# Altium PCB Team_Upsilon_Prj2_smain_pcb.PcbDoc
Units mil, origin at the board's own origin, x right, y up, seen from the top; angles counter-clockwise.
Board outline 3235 x 3830 mil, 2 copper layers (Top Layer, Bottom Layer); 48 components, 53 nets, 158 pads, 0 vias.
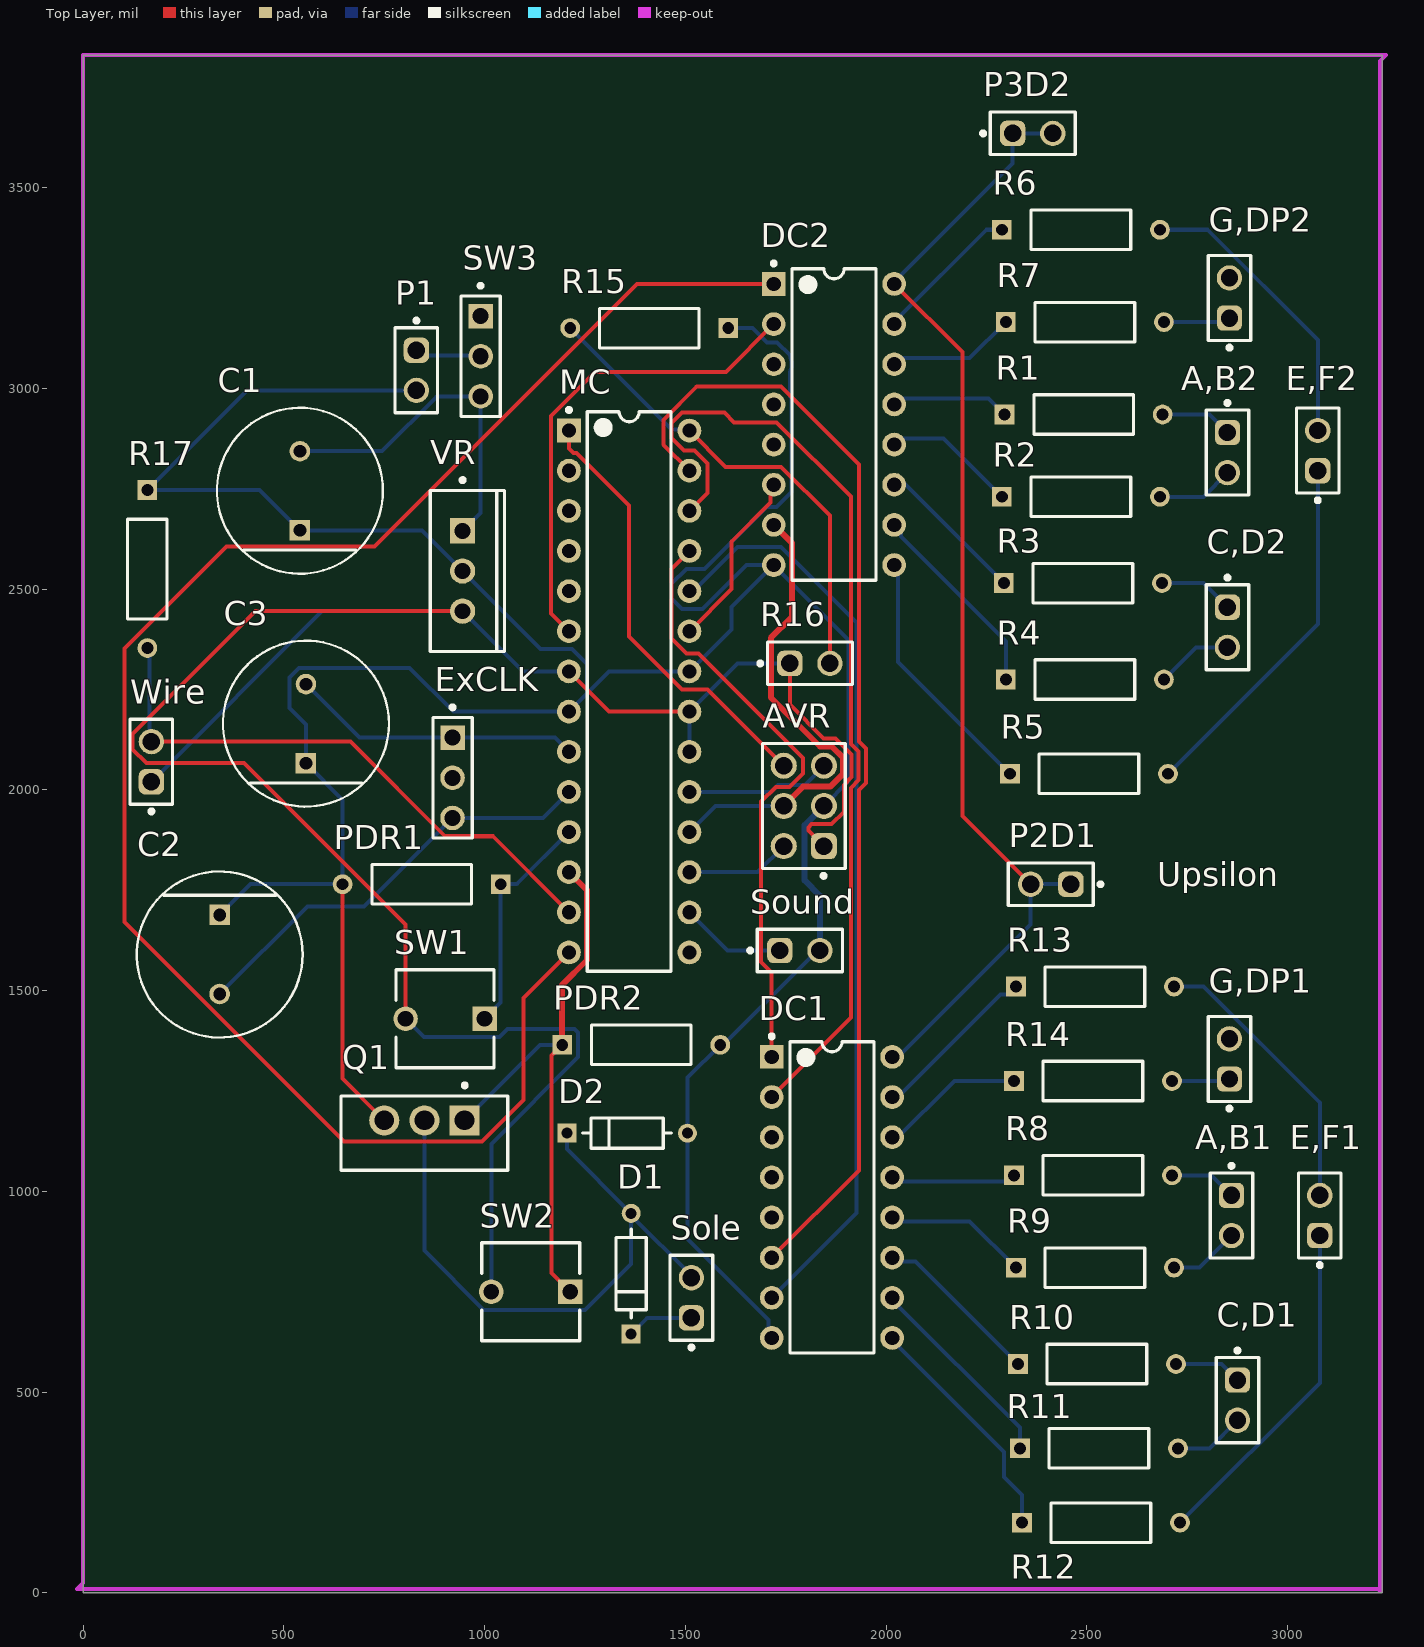
[diagram p0: Top Layer view]
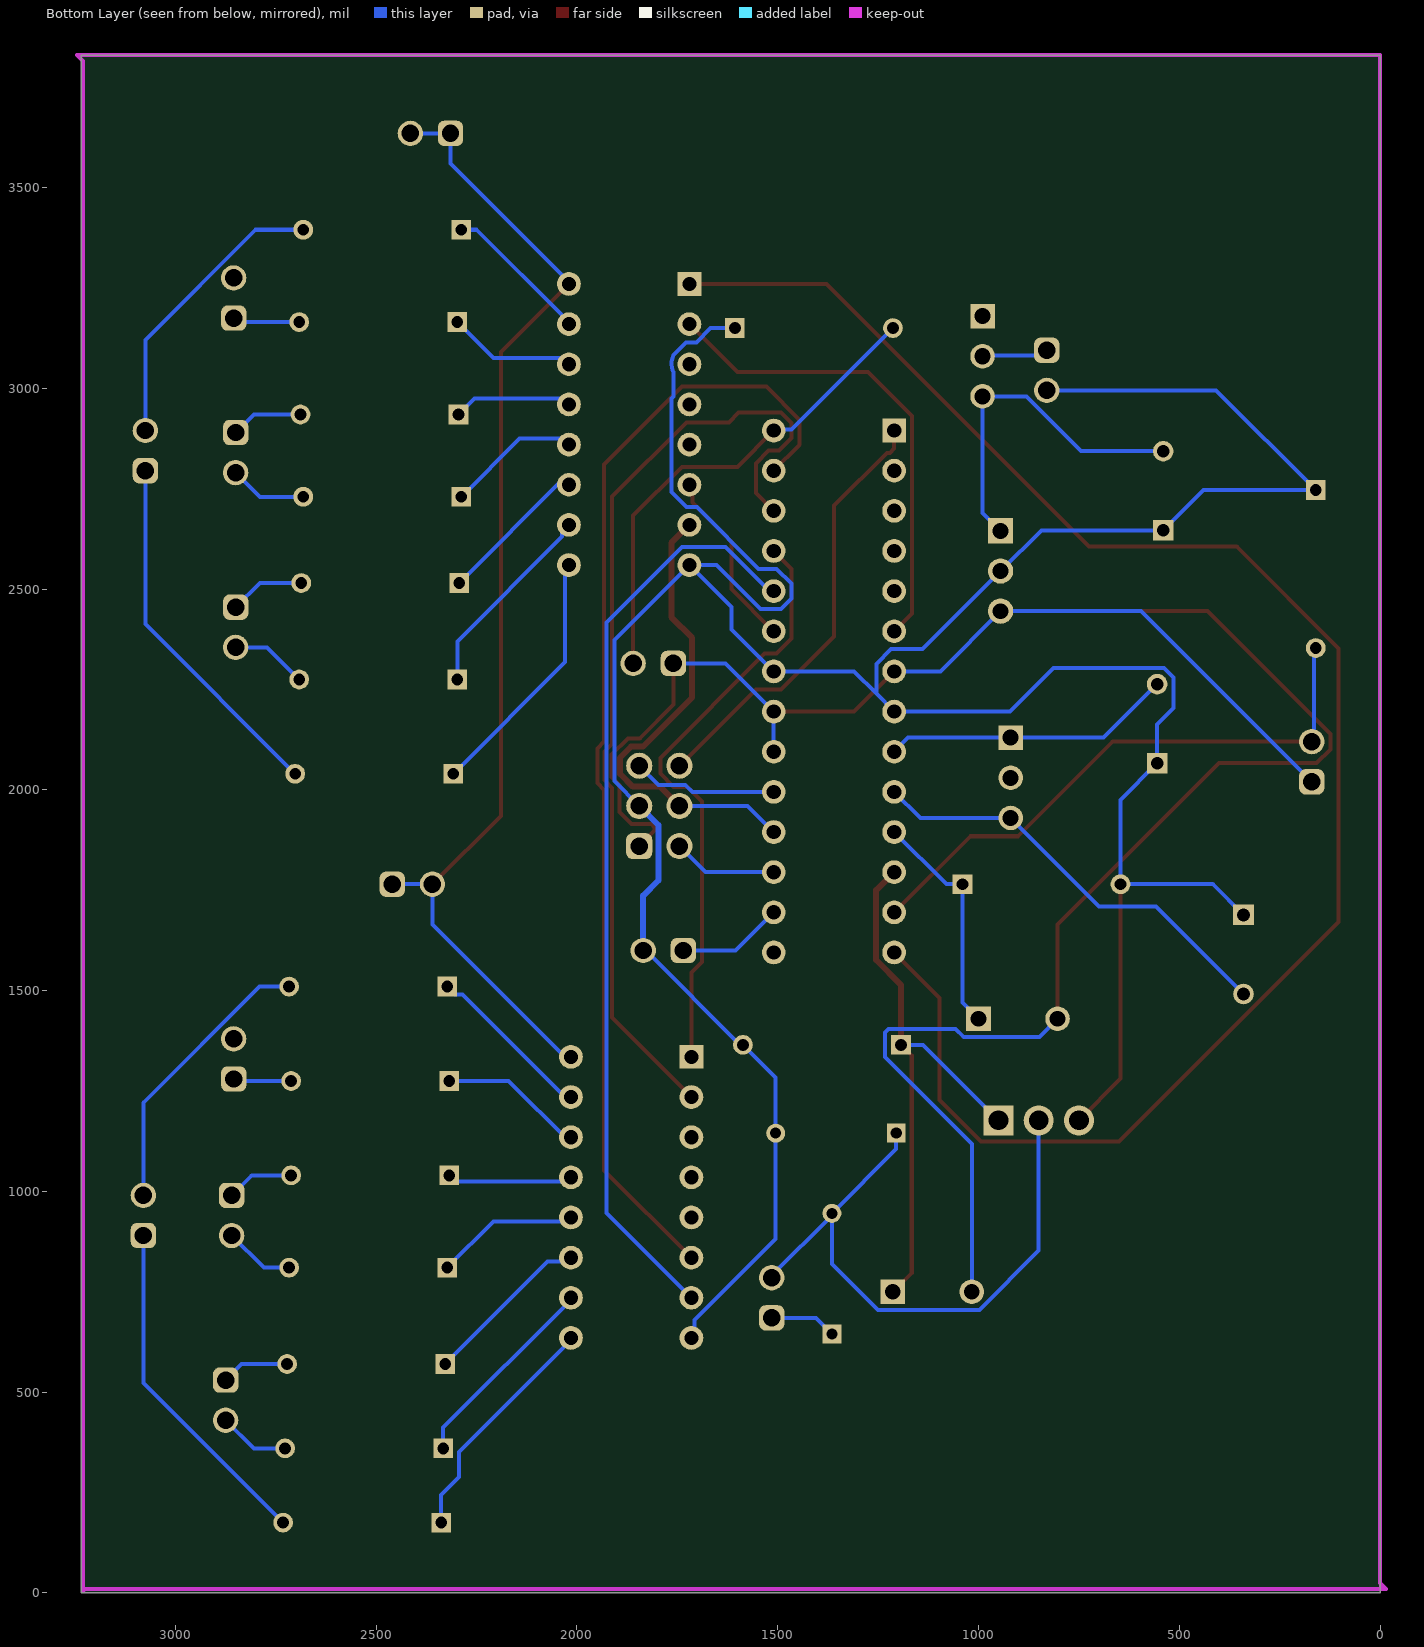
[diagram p1: Bottom Layer view, seen from below]
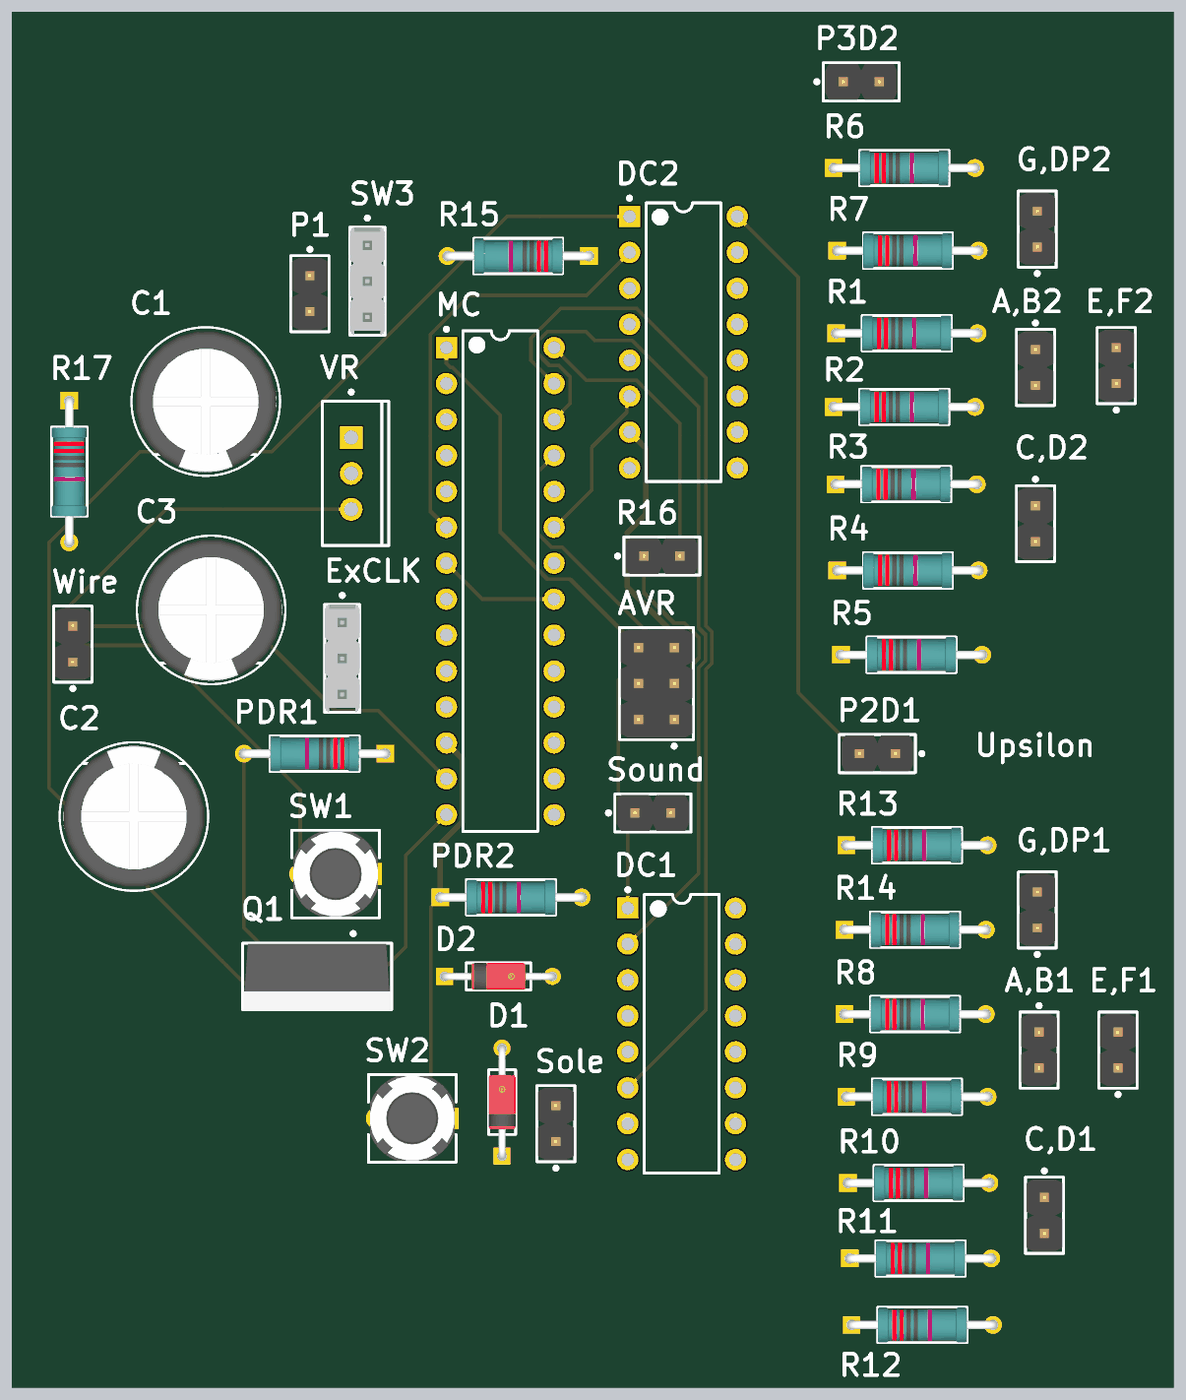
[diagram p2: 3D render of the assembled board from above, using the file's embedded part models]

## Layer stack, top to bottom
Top Solder: solder mask 0.4, Solder Resist, Dk 3.5
Top Layer: signal copper 1.4
Dielectric 1: dielectric 12.6, FR-4, Dk 4.8
Bottom Layer: signal copper 1.4
Bottom Solder: solder mask 0.4, Solder Resist, Dk 3.5

## Board outline
0,0 3235,0 3235,3830 0,3830

## Design rules (kind name [scope] priority, off if disabled: settings)
BoardOutlineClearance [All] p1: gap=7.87 ignorepadtopadclearanceinfootprint=FALSE except(15.75: Arc-SplitBarrior Arc-SplitContinuation Track-SplitBarrior Track-SplitContinuation SMDPad-SplitBarrior SMDPad-SplitContinuation THPad-SplitBarrior THPad-SplitContinuation Via-SplitBarrior Via-SplitContinuation Fill-SplitBarrior Fill-SplitContinuation Poly-SplitBarrior Poly-SplitContinuation Region-SplitBarrior Region-SplitContinuation Text-SplitBarrior Text-SplitContinuation)
Clearance "Clearance Bottom Layer" [OnLayer('Bottom Layer')] p1: gap=8 ignorepadtopadclearanceinfootprint=TRUE except(10: Arc-Text Track-Text SMDPad-Text THPad-Text Via-Text Fill-Text Poly-Text Region-Text Text-Text)
Clearance "Clearance Top Layer" [OnLayer('Top Layer')] p2: gap=8 ignorepadtopadclearanceinfootprint=TRUE except(10: Arc-Text Track-Text SMDPad-Text THPad-Text Via-Text Fill-Text Poly-Text Region-Text Text-Text)
Clearance [All] p3: gap=7.87 ignorepadtopadclearanceinfootprint=FALSE except(3.5: Arc-Arc Arc-Track Arc-SMDPad Track-Track Track-SMDPad SMDPad-SMDPad; 5: Arc-Via Track-Via SMDPad-Via THPad-Via Via-Via; 10: Arc-Text Track-Text SMDPad-Text THPad-Text Via-Text Fill-Text Poly-Text Region-Text Text-Text)
HoleSize [All] p1: absolutevalues=TRUE maxlimit=248.03 minlimit=7.87 maxpercent=80.000 minpercent=20.000
MinimumAnnularRing [All] p1: minimumring=3
MinimumSolderMaskSliver [All] p1: minsoldermaskwidth=3.94
PolygonConnect PolygonConnect_1 [All] p1: thpad.connectstyle=Relief thpad.reliefconductorwidth=20 thpad.reliefentries=4 thpad.polygonreliefangle="90 Angle" thpad.airgapwidth=10 smdpad.connectstyle=Relief smdpad.reliefconductorwidth=20 smdpad.reliefentries=4 smdpad.polygonreliefangle="90 Angle" smdpad.airgapwidth=10 via.connectstyle=Direct via.reliefconductorwidth=20 via.reliefentries=4 via.polygonreliefangle="90 Angle" via.airgapwidth=10
RoutingCorners [All] p1: cornerstyle=Round minsetback=100 maxsetback=100
RoutingVias [All] p1: holewidth=19.68 width=39.37 viastyle="Through Hole" minholewidth=7.87 minwidth=17.72 maxholewidth=39.37 maxwidth=78.74
SilkToSilkClearance [All] p1: silktosilkclearance=3.94
SilkToSolderMaskClearance [IsPad] p1: minsilkscreentomaskgap=3.94 clearancetoexposedcopper=TRUE
SolderMaskExpansion [All] p1: expansion=4 istentingtop=FALSE
Width [All] p1: maxlimit=100 minlimit=3.5 preferedwidth=15
25 further rules are at their usual default settings.

## Components (designator, comment, footprint, x,y, rotation, side; value= is the part's Value field where it differs from the comment)
A,B1 "disp" 61300211121 2860,940 r270 top
A,B2 "disp" 61300211121 2850,2840 r270 top
AVR "61300621121" 61300621121 1795,1960 r90 top
C1 "10uF" FP-RAD-TH-D_10_0_5-L_20_2-MFG 540,2745 r90 top
C2 "22uF" FP-RAD-TH-D_10_0_5-L_20_2-MFG 340,1590 r270 top
C3 "22uF" FP-RAD-TH-D_10_0_5-L_20_2-MFG 555,2165 r90 top
C,D1 "disp" 61300211121 2875,480 r270 top
C,D2 "disp" 61300211121 2850,2405 r270 top
D1 "1N4148TR" FP-017AG-MFG 1365,795.12 r90 top value=4pF
D2 "1N4148TR" FP-017AG-MFG 1355,1145 r0 top value=4pF
DC1 "SN74LS47N" N0016A 1865,985 r0 top
DC2 "SN74LS47N" N0016A 1870,2910 r0 top
E,F1 "disp" 61300211121 3080,940 r90 top
E,F2 "disp" 61300211121 3075,2845 r90 top
ExCLK "16MHz" MOLX-22-28-4033_V 920,2030 r270 top
G,DP1 "disp" 61300211121 2855,1330 r90 top
G,DP2 "disp" 61300211121 2855,3225 r90 top
MC "ATmega328-PU" 28P3 1360,2245 r0 top
P1 "9V_Battery" 61300211121 830,3045 r270 top
P2D1 "dispVCC" 61300211121 2410,1765 r180 top
P3D2 "dispVCC" 61300211121 2365,3635 r0 top
PDR1 "10k" FP-MBB0207-MFG 843.15,1765 r180 top
PDR2 "10k" FP-MBB0207-MFG 1390,1365 r0 top
Q1 "IRF5305PBF" FP-PG-TO220-3-0 850,1145 r270 top
R1 "220" FP-MBB0207-MFG 2491.85,2935 r0 top
R2 "220" FP-MBB0207-MFG 2485,2730 r0 top
R3 "220" FP-MBB0207-MFG 2490,2515 r0 top
R4 "220" FP-MBB0207-MFG 2495,2275 r0 top
R5 "220" FP-MBB0207-MFG 2505,2040 r0 top
R6 "220" FP-MBB0207-MFG 2485,3395 r0 top
R7 "220" FP-MBB0207-MFG 2495,3165 r0 top
R8 "220" FP-MBB0207-MFG 2515,1040 r0 top
R9 "220" FP-MBB0207-MFG 2520,810 r0 top
R10 "220" FP-MBB0207-MFG 2525,570 r0 top
R11 "220" FP-MBB0207-MFG 2530,360 r0 top
R12 "220" FP-MBB0207-MFG 2535,175 r0 top
R13 "220" FP-MBB0207-MFG 2520,1510 r0 top
R14 "220" FP-MBB0207-MFG 2515,1275 r0 top
R15 "1k" FP-MBB0207-MFG 1410,3150 r180 top
R16 "Krabby Patty" 61300211121 1810,2315 r0 top
R17 "220" FP-MBB0207-MFG 160,2550 r270 top
Sole "Karate Chop" 61300211121 1515,735 r90 top
Sound "Speaker" 61300211121 1785,1600 r0 top
SW1 "Start_Button" FP-EVQ11Y04K-MFG 901.57,1430 r180 top
SW2 "PPSolenoid_Button" FP-EVQ11Y04K-MFG 1115,750 r180 top
SW3 "Slide_Switch_Power_Control" MOLX-22-28-4033_V 990,3080 r270 top
VR "LM7805CT" FAIR-TO-220-3 945,2545 r0 top
Wire "Jellyfish" 61300211121 170,2070 r90 top

## Footprints (in the part's own frame and the unit in brackets; to place one, negate y for a bottom-side part, rotate by r counter-clockwise, add the part's x,y. Pads: shape width x height; smd on the part's side, far side on the other; paste and mask are expansions set on the pad)
28P3 [mm] "28-Pin Plastic Dual In-Line Package (PDIP)"
  rect 1.5x1.5 hole 0.9: 1(-3.81,16.51)
  round 1.5 hole 0.9: 2(-3.81,13.97) 3(-3.81,11.43) 4(-3.81,8.89) 5(-3.81,6.35) 6(-3.81,3.81) 7(-3.81,1.27) 8(-3.81,-1.27) 9(-3.81,-3.81) 10(-3.81,-6.35) 11(-3.81,-8.89) 12(-3.81,-11.43) 13(-3.81,-13.97) 14(-3.81,-16.51) 15(3.81,-16.51) 16(3.81,-13.97) 17(3.81,-11.43) 18(3.81,-8.89) 19(3.81,-6.35) 20(3.81,-3.81) 21(3.81,-1.27) 22(3.81,1.27) 23(3.81,3.81) 24(3.81,6.35) 25(3.81,8.89) 26(3.81,11.43) 27(3.81,13.97) 28(3.81,16.51)
  silkscreen extent -3.93,-17.7 2.65,17.93, body extent -3.6,-17.65 3.6,17.65, height 4.58
61300211121 [mm] "Pin Header, pitch 2.54 mm, THT, Vertical, single row, 2p"
  rrect50% 1.6x1.6 hole 1.1: 1(-1.27,0)
  round 1.6 hole 1.1: 2(1.27,0)
  silkscreen extent -3.26,-1.35 2.69,1.35, body extent -2.54,-1.27 2.54,1.27, height 8.57
61300621121 [mm] "Pin Header, pitch 2.54 mm, THT, Vertical, dual row, 6p"
  rrect50% 1.65x1.65 hole 1.1: 1(-2.54,-1.27)
  round 1.65 hole 1.1: 2(-2.54,1.27) 3(0,-1.27) 4(0,1.27) 5(2.54,-1.27) 6(2.54,1.27)
  silkscreen extent -4.54,-2.62 3.96,2.62, body extent -3.81,-2.54 3.81,2.54, height 8.59
FAIR-TO-220-3 [mm] "FM, 3-Leads, Body 10.2x4.7mm, Pitch 2.54mm"
  rect 1.6x1.6 hole 1: 1(0,2.54)
  round 1.6 hole 1: 2(0,0) 3(0,-2.54)
  silkscreen extent -2.04,-5.1 2.66,5.87, body extent -2.04,-5.1 2.66,5.1, height 18.95
FP-017AG-MFG [mm]
  rect 1.2x1.2 hole 0.7 paste-2539.97 mask+0: 1(-3.813,0)
  round 1.2 hole 0.7 paste-2539.97 mask+0: 2(3.813,0)
  silkscreen extent -2.81,-0.95 2.81,0.95, body extent -4.51,-1.05 4.51,1.05, height 0.25
FP-EVQ11Y04K-MFG [mm]
  rect 1.55x1.55 hole 1 paste-2539.97 mask+0: A(-2.5,0)
  round 1.55 hole 1 paste-2539.97 mask+0: B(2.5,0)
  silkscreen extent -3.1,-3.1 3.1,3.1, body extent -3.37,-3.2 3.37,3.2, height 0.25
FP-MBB0207-MFG [mm]
  rect 1.25x1.25 hole 0.75 paste-2539.97 mask+0: 1(-5,0)
  round 1.25 hole 0.75 paste-2539.97 mask+0: 2(5,0)
  silkscreen extent -3.15,-1.25 3.15,1.25, body extent -5.72,-1.35 5.72,1.35, height 0.25
FP-PG-TO220-3-0 [mm]
  rect 1.9x1.9 hole 1.25 paste-2539.97 mask+0: 1(-0.81,2.54)
  round 1.9 hole 1.25 paste-2539.97 mask+0: 2(-0.81,0) 3(-0.81,-2.54)
  silkscreen extent -3.15,-5.27 2.34,5.27, body extent -2.44,-5.37 2.44,5.37, height 0.25
FP-RAD-TH-D_10_0_5-L_20_2-MFG [mm]
  rect 1.3x1.3 hole 0.8 paste-2539.97 mask+0: 1(-2.5,0)
  round 1.3 hole 0.8 paste-2539.97 mask+0: 2(2.5,0)
  silkscreen extent -5.25,-5.25 5.25,5.25, body extent -5.35,-5.35 5.35,5.35, height 0.25
MOLX-22-28-4033_V [mm] "THD, 3-Leads, Body 7.62x2.49mm, Pitch 2.54mm"
  rect 1.55x1.55 hole 1.02: 1(-2.54,0)
  round 1.55 hole 1.02: 2(0,0) 3(2.54,0)
  silkscreen extent -4.58,-1.24 3.81,1.24, body extent -3.81,-1.24 3.81,1.24, height 8.38
N0016A [mm] "DIP, 16-Leads, Body 19.7x6.6mm, Pitch 2.54mm"
  rect 1.5x1.5 hole 0.9: 1(-3.81,8.89)
  round 1.5 hole 0.9: 2(-3.81,6.35) 3(-3.81,3.81) 4(-3.81,1.27) 5(-3.81,-1.27) 6(-3.81,-3.81) 7(-3.81,-6.35) 8(-3.81,-8.89) 9(3.81,-8.89) 10(3.81,-6.35) 11(3.81,-3.81) 12(3.81,-1.27) 13(3.81,1.27) 14(3.81,3.81) 15(3.81,6.35) 16(3.81,8.89)
  silkscreen extent -3.93,-9.85 2.65,10.31, body extent -3.95,-9.85 3.95,9.85, height 5.08

## Part data
A,B1 A,B2 C,D1 C,D2 E,F1 E,F2 G,DP1 G,DP2 P1 P2D1 P3D2 R16 Sole Sound Wire: library part CMP-1712-00002-6, Color=Black, Contact Resistance=20mΩ, Current Rating=3A, Max Operating Temperature=125°C, Min Operating Temperature=-40°C, Operating Supply Voltage=250V, Connector Type="Male Pin", Contact Gender=Male, Contact Material=Copper, Contact Mating Length=5.9944mm, Contact Plating=Gold, Gender=Male, Height=8.94mm, Housing Material=PBT, Lead Free="Lead Free", Lead Pitch=2.54mm, Mount="Through Hole", NexarPartId=20081794, Number of Contacts=2, Number of Pins=2, Number of Positions=2, Number of Rows=1, Orientation=Vertical, Packaging=Bulk, Pitch=2.54mm, REACH SVHC="No SVHC", RoHS=Compliant, Termination="Through Hole", Voltage Rating=250V
AVR: library part CMP-1502-01072-3, Color=Black, Contact Resistance=20mΩ, Current Rating=3A, Max Operating Temperature=105°C, Min Operating Temperature=-40°C, Operating Supply Voltage=250V, Connector Type="Male Pin", Contact Material=Copper, Contact Mating Length=5.9944mm, Contact Plating=Gold, Gender=Male, Height=8.89mm, Lead Pitch=2.54mm, Mount="Through Hole", NexarPartId=32855529, Number of Contacts=6, Number of Pins=6, Number of Positions=6, Number of Rows=2, Orientation=Vertical, Packaging=Bulk, Pitch=2.54mm, REACH SVHC=Unknown, RoHS=Compliant, Row Spacing=2.54mm, Termination=Solder, Voltage Rating=250V
C1: library part CMP-05427-001613-1, "Aluminum Electrolytic Capacitors (Radial Lead Type) 10uF ±20% 400V", Case/Package=Radial, Dielectric Material=Aluminium, Max Operating Temperature=105°C, Min Operating Temperature=-25°C, Package Quantity=200, Ripple Current=300mA, Tolerance=20%, Voltage=400V, Capacitance=10uF, Construction=RADIAL, Contact Plating=Tin, Diameter=10mm, Dissipation Factor=0.24%, Height=20mm, Height - Seated (Max)=0.787inch, Lead Diameter=0.6mm, Lead Free="Lead Free", Lead Pitch=5mm, Length=20mm, Life (Hours)=8000Hour, Mount="Through Hole", Number of Pins=2, Packaging=Bulk, Polarity=Polar, Radiation Hardening=No, REACH SVHC="No SVHC", Ripple Current (AC)=300mA, RoHS Compliant=Yes, Series=ED, Termination=Radial, Voltage Rating=400V, Voltage Rating (DC)=400V
C2 C3: library part CMP-05427-001613-1, "Aluminum Electrolytic Capacitors (Radial Lead Type) 10uF ±20% 400V", Capacitance=10uF, Case/Package=Radial, Dielectric Material=Aluminium, Max Operating Temperature=105°C, Min Operating Temperature=-25°C, Package Quantity=200, Ripple Current=300mA, Tolerance=20%, Voltage=400V, Construction=RADIAL, Contact Plating=Tin, Diameter=10mm, Dissipation Factor=0.24%, Height=20mm, Height - Seated (Max)=0.787inch, Lead Diameter=0.6mm, Lead Free="Lead Free", Lead Pitch=5mm, Length=20mm, Life (Hours)=8000Hour, Mount="Through Hole", Number of Pins=2, Packaging=Bulk, Polarity=Polar, Radiation Hardening=No, REACH SVHC="No SVHC", Ripple Current (AC)=300mA, RoHS Compliant=Yes, Series=ED, Termination=Radial, Voltage Rating=400V, Voltage Rating (DC)=400V
D1 D2: library part CMP-07163-000030-1, "DIODE GEN PURP 100V 200MA DO35", Capacitance=4pF, Forward Current=200mA, Manufacturer="ON Semiconductor", Max Junction Temp=+175°C, Max Repetitive Reverse Voltage=100V, Max Surge Forward Current=1A, Package=017AG, Peak Reverse Current=5uA, Temperature="-55°C to +175°C", Temperature Range Low=-55°C, Automotive=No, Category=Diode, ComponentLink2Description=Datasheet, ComponentLink2URL=https://www.onsemi.com/pub/Collateral/1N914A-D.pdf, Device Class L1="Discrete Semiconductors", Device Class L2=Diodes, Device Class L3="Rectifier Diodes", Digikey Description="DIODE GEN PURP 100V 200MA DO35", Footprint Url=https://www.onsemi.com/pub/Collateral/017AG.PDF, Height=1.91mm, Lead Free=Yes, Manufacturer Part Number=1N4148TR, Mouser Description="1N4148 Series 100 V 500 mW Small Signal Fast Switching Diode - DO-35", Octopart=https://octopart.com/1n4148tr-on+semiconductor-84323125, Reverse Voltage=100V, RoHS=TRUE, Temperature Range High=+175°C
DC1 DC2: library part CMP-0388-00303-2, "BCD-to-7-Segment Decoder / Driver, 4.75 to 5.25 V, 0 to 70 degC, 16-pin DIP (N16), Pb-Free (RoHS)", Manufacturer="Texas Instruments", Rating=Catalog, Code_JEDEC=MS-001, ComponentLink1Description="Manufacturer URL", ComponentLink1URL=http://www.ti.com/, ComponentLink2Description=Datasheet, ComponentLink2URL=http://www.ti.com/general/docs/lit/getliterature.tsp?genericPartNumber=SN74LS47&fileType=pdf, ComponentLink3Description="Package Specification", ComponentLink3URL=http://www.ti.com/litv/pdf/mpdi002c, DatasheetVersion=SDLS111, Eco-Plan="Pb-Free (RoHS)", Mounting Technology="Through Hole", PackageDescription="16-Pin Plastic In-Line, Body 19.305 x 6.35 mm, Pitch 2.54 mm", PackageReference=N0016A, PackageVersion=4040049/E, PartNumber=SN74LS47N, SubFamily="Discrete Segment LED Driver", Vin(Max)(V)=5.25, Vin(Min)(V)=4.75
ExCLK SW3: library part CMP-1676-00001-5, "Male Header, Pitch 2.54 mm, 1 x 3 Position, Height 8.38 mm, Tail Length 3.18 mm, RoHS, Bulk", Colour=Black, Current Rating="4 A", Manufacturer=Molex, Max Operating Temperature="75 degC", Min Operating Temperature="0 degC", Package Quantity=1, Voltage Rating="250 V", ComponentLink1Description="Manufacturer URL", ComponentLink1URL=http://www.molex.com/, ComponentLink2Description=Datasheet, ComponentLink2URL=http://www.molex.com/pdm_docs/sd/022284033_sd.pdf, Contact Finish=Gold, Contact Material=Brass, Contact Plating=Gold, DatasheetVersion="Rev. G, 01/2012", Height="8.38 mm", Lead Pitch="0.1 inch", Length="7.62 mm", Mount="Through Hole", Mounting Technology="Through Hole", PackageDescription="Male Header, Pitch 2.54 mm, 1 x 3 Position, Height 8.38 mm, Tail Length 3.18 mm", PackageReference=22-28-4033, Packaging=Bulk, Pins=3, REACH SVHC=Unknown, RoHSCompliant=true, Rows=1
MC: library part CMP-0095-00015-2, "8-bit AVR Microcontroller, 32KB Flash, 1KB EEPROM, 2KB SRAM, 28-pin PDIP, Industrial Grade (-40°C to 85°C)", ComponentLink1Description="Manufacturer URL", ComponentLink1URL=http://www.atmel.com/, ComponentLink2Description="ATmega48A/48PA/88A/88PA/168A/168PA/328/328P Datasheet", ComponentLink2URL=http://www.atmel.com/dyn/resources/prod_documents/8271.pdf, ComponentLink3Description="ATmega48A/48PA/88A/88PA/168A/168PA/328/328P Summary", ComponentLink3URL=http://www.atmel.com/dyn/resources/prod_documents/8271S.pdf, DatasheetVersion="revD, May-2011", PackageDescription="28-lead (0.300\"/7.62mm Wide) Plastic Dual Inline Package (PDIP)", PackageReference=28P3, PackageVersion="revB, Sep-2001", RevisionNote="DatasheetVersion updated. URLs added."
PDR1 PDR2 R1 R2 R3 R4 R5 R6 R7 R8 R9 R10 R11 R12 R13 R14 R15 R17: library part CMP-02408-000035-1, "RES 10K OHM 0.6W 1% AXIAL", Case/Package=Conformal, Max Operating Temperature=155°C, Max Power Dissipation=600mW, Min Operating Temperature=-55°C, Resistance=10kR, Resistance Tolerance=1%, Resistor Type="Metal Film", Temperature Coefficient=50ppm/°C, Voltage Rating=300V, Construction=Cylindrical, Contact Plating=Tin, Diameter=2.5mm, Features="Automotive AEC-Q200", Lead Free="Lead Free", Length=6.5mm, Military Standard=Not, Number of Terminations=2, Packaging="Tape and Reel", Power Rating=600mW, Radiation Hardening=No, RoHS Compliant=Yes, Series="MBB 0207 - Professional", Technology="THIN FILM", Termination=Axial, Tolerance=1%, Voltage Rating (DC)=300V
Q1: library part CMP-32901-000003-1, "MOSFET P-CH 55V 31A TO-220AB", Continuous Drain Current=-31A, Drain To Source Breakdown Voltage=-55V, Drain To Source Resistance=0.06Ω, Gate To Source Voltage=20V, Input Capacitace At Vds="1200pF @ -25V", Manufacturer=Infineon, Max Forward Diode Voltage=-1.3V, Max Junction Temp=+175°C, Package=PG-TO220-3, Power Dissipation=110W, Pulse Drain Current=-110A, Temperature="-55°C to +175°C", Temperature Range Low=-55°C, Automotive=No, Category=Trans, ComponentLink2Description=Datasheet, ComponentLink2URL=https://www.infineon.com/dgdl/irf5305pbf.pdf?fileId=5546d462533600a4015355e370101993, Depletion Mode=False, Device Class L1="Discrete Semiconductors", Device Class L2=Transistors, Device Class L3=MOSFETs, Digikey Description="MOSFET P-CH 55V 31A TO-220AB", Drain To Source Voltage=-55V, Gate Charge At Vgs="63nC @ -10V", Height=19.3mm, Lead Free=Yes, Manufacturer Part Number=IRF5305PBF, Number Of Channels=1, Number Of P Channels=1, Octopart=https://octopart.com/irf5305pbf-infineon-65873396, Reverse Recovery Charge=170nC, Reverse Recovery Time=71ns, RoHS=TRUE, Rthja Max=62°C/W, Standoff Height=3.55mm, Temperature Range High=+175°C, Threshold Vgs Max=-4V, Threshold Vgs Min=-2V, Turn Off Delay Time=39ns, Turn On Delay Time=14ns
SW1 SW2: library part CMP-05618-000106-1, "SWITCH TACTILE SPST-NO 0.02A 15V", Actuator Color=Black, Case/Package=Radial, Contact Resistance=50mR, Max Operating Temperature=70°C, Max Voltage Rating (DC)=15V, Min Operating Temperature=-20°C, Operating Force=1.6N, Package Quantity=1, Actuator Length=0.4mm, Actuator Type=Standard, Electrical Life=1000000Cycles, Illumination Type=Non-Illuminated, Lead Free="Lead Free", Mechanical Life=1000000Cycles, Mount="Through Hole", Orientation=Straight, Packaging="Tape and Reel", Radiation Hardening=No, RoHS Compliant=Yes, Series=EVQ11, Size=6mm, Switch Function=Off-Mom, Switch Travel=0.25mm, Termination="PC Pin", Throw Configuration=SPST
VR: library part CMP-2000-04938-1, "Positive Voltage Regulator, 5 V, 1 A, -40 to 125 degC, 3-Pin TO-220, RoHS, Tube", Manufacturer=FairchildSemiconductor, Maximum Input Voltage=35V, Maximum Output Current=2.2(Typ)A, Maximum Quiescent Current=8mA, Operating Temperature=-40to125degC, Output Voltage=5V, Package=3TO-220AB, Package Description="3-Pin Through Hole Device, Body 10 x 4.5 mm, Pitch 2.54 mm", Package Reference=TO-220, Typical Dropout Voltage @ Current=2@1AV, Accuracy=±4%, Category=LinearRegulator, Datasheet URL=https://datasheet.ciiva.com/26904/lm7805ct-26904988.pdf, Datasheet Version=Aug-12, Line Regulation=100mV, Load Regulation=100mV, Manufacturer URL=https://www.fairchildsemi.com/, Mounting=ThroughHole, Number of Outputs=1, Output Type=Fixed, Package URL=https://www.fairchildsemi.com/package-drawings/TO/TO220B03.pdf, Packaging=Rail/Tube, Polarity=Positive, Rad Hard=No, Type=Linear

## Nets (pads, with @x,y where several pads share a name; then routed paths per layer and width w, separated by ;. In a path a pad name is that pad's centre, name@x,y a point inside that pad or via, vN(x,y) a via of type N, cw(c..) or ccw(c..) an arc to the next point about the centre after c; other vN are vias at no path point)
NetA,B1_1: A,B1.1 R8.2 | length 168.9
  Bottom Layer w10: R8.2 2810,1040 2860,990
NetA,B1_2: A,B1.2 R9.2 | length 176.3
  Bottom Layer w10: R9.2 2780,810 2860,890
NetA,B2_1: A,B2.1 R1.2 | length 179.9
  Bottom Layer w10: R1.2 2805,2935 2850,2890
NetA,B2_2: A,B2.2 R2.2 | length 196.6
  Bottom Layer w10: R2.2@2678.28,2730 2790,2730 2850,2790
NetAVR_1: AVR.1 MC.7 MC.20 MC.21 R16.1 SW1.B SW2.B VR.3 Wire.1 | length 5921.3
  Top Layer w10: SW1.B 803.15,1664.16 400.81,2066.5 157.75,2066.5 123.5,2100.74 123.5,2139.26 429.24,2445 VR.3 ; MC.7 1310,2195 MC.21 ; R16.1 1760,2212.15 1843.67,2128.48 1873.37,2128.48 1913.48,2088.37 1913.48,2031.63 1894.48,2012.63 1894.48,1945.16 1863.84,1914.52 1814.57,1914.52 1806.67,1906.61 1806.67,1898.33 AVR.1
  Bottom Layer w10: Wire.1 595,2445 VR.3 1095,2295 MC.7 ; SW1.B 848.66,1384.49 1036.73,1384.49 1056.84,1404.61 1223.97,1404.61 1232.76,1395.82 1232.76,1334.18 1016.57,1118 SW2.B ; MC.20 MC.21 1630,2315 R16.1
NetAVR_2: AVR.2 MC.17 | length 261.9
  Bottom Layer w10: MC.17 1680,1795 AVR.2
NetAVR_3: AVR.3 C1.1 C2.1 C3.1 D2.2 DC1.8 DC2.8 MC.8 MC.22 P1.2 PDR1.2 PDR2.2 Q1.3 R15.1 R17.1 Sound.2 VR.2 | length 8664.9
  Top Layer w10: PDR1.2 646.3,1280.59 Q1.3
  Bottom Layer w10: C2.1 416.57,1765 PDR1.2 646.3,1975.28 C3.1 555,2163.41 514.41,2204 514.41,2280.24 538.19,2304.02 812.95,2304.02 921.96,2195 MC.8 1254.53,2239.53 ; P1.2 408.15,2995 R17.1 439.72,2746.85 C1.1 843.43,2646.57 VR.2 1139.53,2350.47 1217.5,2350.47 1254.53,2313.44 1254.53,2239.53 ; R15.1 1667.03,3150 1702.81,3114.22 1728.75,3114.22 1760,3082.97 1763.03,3071.47 cw(c1720,3060) 1760,3040.44 1760,2979.56 1764.53,2975.04 1764.53,2741.56 1727.5,2704.53 1701.56,2704.53 1547.5,2550.47 1502.5,2550.47 1465.47,2513.44 1465.47,2476.56 1491.56,2450.47 1542.81,2450.47 1652.33,2560 DC2.8 ; DC1.8 1707.5,642.5 1707.5,679.53 1505.12,881.91 D2.2 1505.12,1283.27 PDR2.2 1593.43,1365 1828.43,1600 Sound.2 ; AVR.3 1906.5,2021.5 1906.5,2373.5 DC2.8 ; 1254.53,2239.53 1310,2295 MC.22 1615,2400 1615,2455 DC2.8
  Bottom Layer w15: Sound.2 1835,1736.75 1797.02,1774.73 1797.02,1912.02 AVR.3
NetAVR_4: AVR.4 DC2.7 MC.18 | length 1195.1
  Top Layer w15: DC2.7 1765.03,2614.97 1765.03,2430.41 1713,2378.39 1713,2230.15 1835.18,2107.98 1864.87,2107.98 1892.98,2079.87 1892.98,2040.13 1860.83,2007.98 1792.98,2007.98 AVR.4
  Bottom Layer w10: MC.18 1575,1960 AVR.4
NetAVR_5: AVR.5 MC.19 | length 361.9
  Bottom Layer w10: MC.19 1712.85,1995 1730.37,2012.52 1797.52,2012.52 AVR.5
NetAVR_6: AVR.6 MC.1 | length 1097.9
  Top Layer w10: MC.1 1210,2850.47 1220.94,2839.53 1228.44,2839.53 1360,2707.97 1360,2382.03 1491.56,2250.47 1554.53,2250.47 AVR.6
NetC1_2: C1.2 SW3.3 VR.1 | length 860.2
  Bottom Layer w10: C1.2 744.18,2843.43 880.76,2980 SW3.3 990,2690 VR.1
NetC2_2: C2.2 ExCLK.3 MC.10 | length 1078.5
  Bottom Layer w10: C2.2 558.27,1709.85 699.85,1709.85 ExCLK.3 1145,1930 MC.10
NetC3_2: C3.2 ExCLK.1 MC.9 | length 724.8
  Bottom Layer w10: C3.2 688.43,2130 ExCLK.1 1175,2130 MC.9
NetC,D1_1: C,D1.1 R10.2 | length 169.7
  Bottom Layer w10: R10.2 2835,570 2875,530
NetC,D1_2: C,D1.2 R11.2 | length 177.1
  Bottom Layer w10: R11.2 2805,360 2875,430
NetC,D2_1: C,D2.1 R3.2 | length 188
  Bottom Layer w10: R3.2 2790,2515 2850,2455
NetC,D2_2: C,D2.2 R4.2 | length 191.3
  Bottom Layer w10: R4.2 2771.85,2355 2850,2355
NetD1_1: D1.1 Sole.1 | length 166.6
  Bottom Layer w10: D1.1 1405,685 Sole.1
NetD1_2: D1.2 D2.1 Q1.2 Sole.2 | length 1557.7
  Bottom Layer w10: Q1.2 850,852.21 997.72,704.49 1250.15,704.49 1365,819.34 D1.2@1365,940.12 ; D2.1 1204.88,1105.35 D1.2 D1.2@1365,940.12 ; Sole.2 1515,790.12 D1.2@1365,940.12
NetDC1_1: DC1.1 MC.25 | length 1505.7
  Top Layer w10: MC.25 1465.47,2550.47 1465.47,2376.56 1502.5,2339.53 1532.62,2339.53 1792.48,2079.67 1792.48,2040.33 1759.63,2007.48 1725.33,2007.48 1688.5,1970.65 1688.5,1571.52 1715,1545.02 DC1.1
NetDC1_2: DC1.2 MC.26 | length 2426.4
  Top Layer w10: MC.26 1554.53,2739.53 1554.53,2813.44 1522.97,2845 1497.03,2845 1465.47,2876.56 1465.47,2913.44 1491.56,2939.53 1597.5,2939.53 1621.56,2915.47 1727.5,2915.47 1912.48,2730.49 1912.48,2114.82 1931.48,2095.82 1931.48,2024.18 1912.48,2005.18 1912.48,1432.48 DC1.2
NetDC1_6: DC1.6 MC.27 | length 2834.8
  Top Layer w10: MC.27 1445.47,2859.53 1445.47,2921.73 1528.27,3004.53 1738.44,3004.53 1932.48,2810.49 1932.48,2120.28 1949.48,2103.28 1949.48,2016.72 1932.48,1999.72 1932.48,1052.48 DC1.6
NetDC1_7: DC1.7 MC.24 | length 2308.8
  Bottom Layer w10: MC.24 1520.31,2495 1629.84,2604.53 1738.44,2604.53 1926.5,2416.48 1926.5,946.5 DC1.7
NetDC1_9: DC1.9 R12.1 | length 581.8
  Bottom Layer w10: DC1.9@2020,625 2293.54,351.46 2293.54,288.7 2338.15,244.09 R12.1
NetDC1_10: DC1.10 R11.1 | length 494.7
  Bottom Layer w10: DC1.10@2020,725 2333.15,411.85 R11.1
NetDC1_11: DC1.11 R10.1 | length 413.8
  Bottom Layer w10: DC1.11@2020,825 2073.15,825 R10.1
NetDC1_12: DC1.12 R9.1 | length 350.8
  Bottom Layer w10: DC1.12@2020,925 2208.15,925 R9.1
NetDC1_13: DC1.13 R8.1 | length 304.4
  Bottom Layer w10: DC1.13@2020,1025 2303.15,1025 R8.1
NetDC1_14: DC1.14 R14.1 | length 360.3
  Bottom Layer w10: DC1.14@2020,1125 2170,1275 R14.1
NetDC1_15: DC1.15 R13.1 | length 421.2
  Bottom Layer w10: DC1.15@2020,1225 2285.39,1490.39 2303.54,1490.39 R13.1
NetDC1_16: DC1.16 DC2.16 P2D1.1 P2D1.2 P3D2.1 P3D2.2 | length 2894.7
  Top Layer w10: DC2.16 2189.62,3090.38 2189.62,1935.38 P2D1.2
  Bottom Layer w10: DC1.16@2020,1325 2360,1665 P2D1.2 P2D1.1 ; DC2.16@2030,3275 2315,3560 P3D2.1 P3D2.2
NetDC2_1: DC2.1 MC.14 | length 4350.8
  Top Layer w10: MC.14 1097.11,1482.11 1097.11,1227.99 993.61,1124.49 649.68,1124.49 103.5,1670.67 103.5,2352.67 356.82,2605.98 725.15,2605.98 1379.16,3260 DC2.1
NetDC2_2: DC2.2 MC.6 | length 1203.7
  Top Layer w10: MC.6 1165.47,2439.53 1165.47,2930.74 1275.41,3040.68 1600.68,3040.68 DC2.2
NetDC2_6: DC2.6 MC.23 | length 452
  Top Layer w10: MC.23 1615,2500 1615,2617.97 1712.5,2715.47 1712.5,2752.5 DC2.6
NetDC2_9: DC2.9 R5.1 | length 650.2
  Bottom Layer w10: DC2.9@2030,2575 2030,2318.15 R5.1
NetDC2_10: DC2.10 R4.1 | length 511.1
  Bottom Layer w10: DC2.10@2030,2675 2037.5,2667.5 2037.5,2630.47 2298.15,2369.82 R4.1
NetDC2_11: DC2.11 R3.1 | length 370.8
  Bottom Layer w10: DC2.11@2030,2775 2033.15,2775 R3.1
NetDC2_12: DC2.12 R2.1 | length 318.2
  Bottom Layer w10: DC2.12@2030,2875 2143.15,2875 R2.1
NetDC2_13: DC2.13 R1.1 | length 281.6
  Bottom Layer w10: DC2.13@2030,2975 2255,2975 R1.1
NetDC2_14: DC2.14 R7.1 | length 305.4
  Bottom Layer w10: DC2.14@2030,3075 2208.15,3075 R7.1
NetDC2_15: DC2.15 R6.1 | length 349.3
  Bottom Layer w10: DC2.15@2030,3175 2250,3395 R6.1
NetE,F1_1: E,F1.1 R12.2 | length 859.2
  Bottom Layer w10: R12.2 3080,523.15 3080,890
NetE,F1_2: E,F1.2 R13.2 | length 713.7
  Bottom Layer w10: R13.2 2790.76,1510 3080,1220.76 3080,990
NetE,F2_1: E,F2.1 R5.2 | length 909.6
  Bottom Layer w10: R5.2 3075,2413.15 3075,2795
NetE,F2_2: E,F2.2 R6.2 | length 732.5
  Bottom Layer w10: R6.2 2800.76,3395 3075,3120.76 3075,2895
NetG,DP1_1: G,DP1.1 R14.2 | length 145.2
  Bottom Layer w10: R14.2 2850,1275 2855,1280
NetG,DP2_1: G,DP2.1 R7.2 | length 167.3
  Bottom Layer w10: R7.2 2845,3165 2855,3175
NetMC_11: MC.11 PDR1.1 SW1.A | length 575.4
  Bottom Layer w10: SW1.A 1040,1470 PDR1.1 1080,1765 MC.11
NetMC_12: MC.12 PDR2.1 Q1.1 SW2.A | length 1441
  Top Layer w10: PDR2.1 1166.26,1338.11 1166.26,797.17 SW2.A
  Top Layer w15: PDR2.1 1193.15,1514.47 1255.03,1576.35 1255.03,1749.97 MC.12
  Bottom Layer w10: Q1.1 1138.11,1365 PDR2.1
NetMC_13: MC.13 R17.2 Wire.2 | length 1453.3
  Top Layer w10: Wire.2 665.64,2120 901.15,1884.49 1020.51,1884.49 MC.13
  Bottom Layer w10: R17.2 165,2348.15 165,2125 Wire.2
NetMC_16: MC.16 Sound.1 | length 264.4
  Bottom Layer w10: MC.16 1605,1600 Sound.1
NetMC_28: MC.28 R15.2 R16.2 | length 1208.3
  Top Layer w10: MC.28 1600.47,2804.53 1738.44,2804.53 1860,2682.97 R16.2
  Bottom Layer w10: R15.2 1465.47,2897.68 1507.32,2897.68 MC.28
NetP1_1: P1.1 SW3.2 | length 166.2
  Bottom Layer w10: P1.1 842.87,3082.13 987.87,3082.13 SW3.2
pads on no net: DC1.3 DC1.4 DC1.5 DC2.3 DC2.4 DC2.5 ExCLK.2 G,DP1.2 G,DP2.2 MC.2 MC.3 MC.4 MC.5 MC.15 SW3.1

## Keep-outs
Keep-Out Layer:
  lines w10: -7.5,17.5 -2.5,17.5 ; 0,3175 0,3830 3245,3830 3230,3815 3230,5 3225,10 -15,10 0,25 0,3215

## Silkscreen, mask and mechanical layers (free items; w line width, h text height)
Top Overlay:
  text "Upsilon" at 2675,1759.99 h60